# Altium PCB Enchante.PcbDoc
Units mm, origin at the board's own origin, x right, y up, seen from the top; angles counter-clockwise.
Board outline 76.36 x 55 mm, 2 copper layers (Top Layer, Bottom Layer); 104 components, 41 nets, 328 pads, 35 vias.
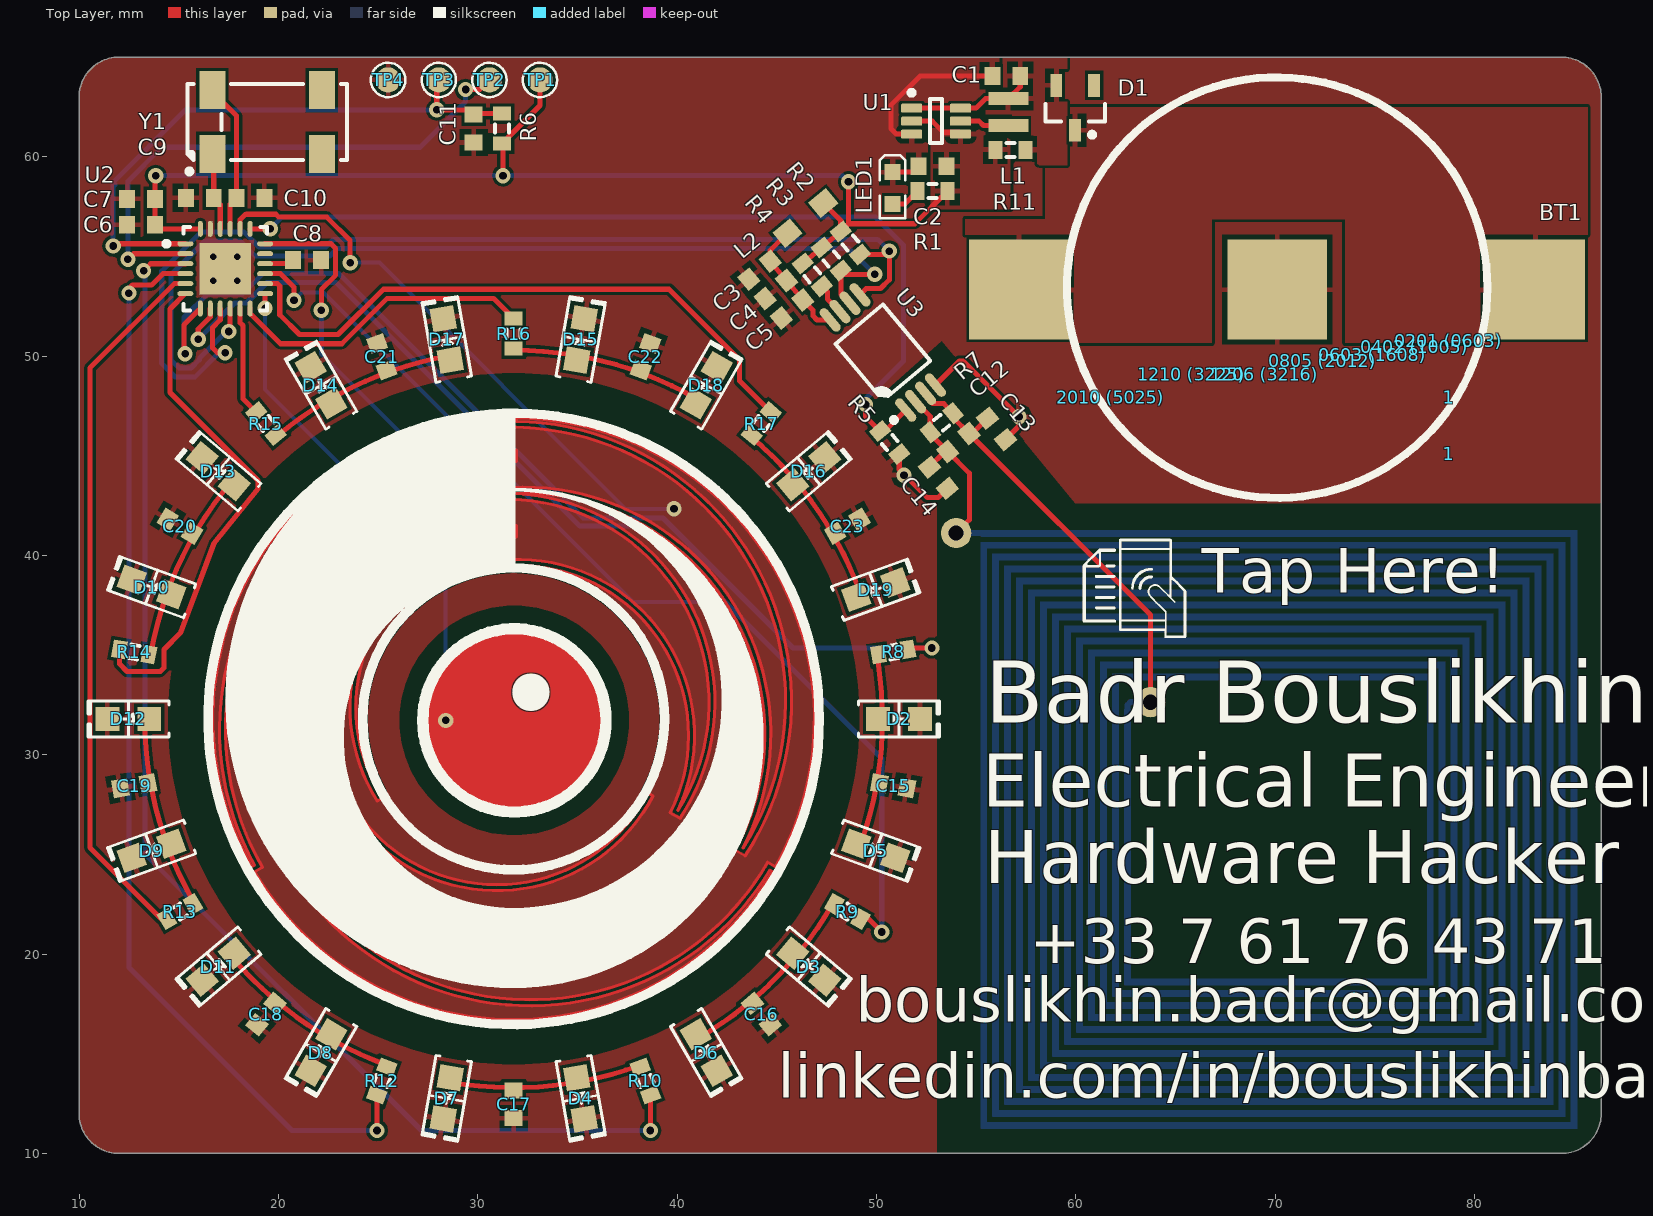
[diagram p0: Top Layer view]
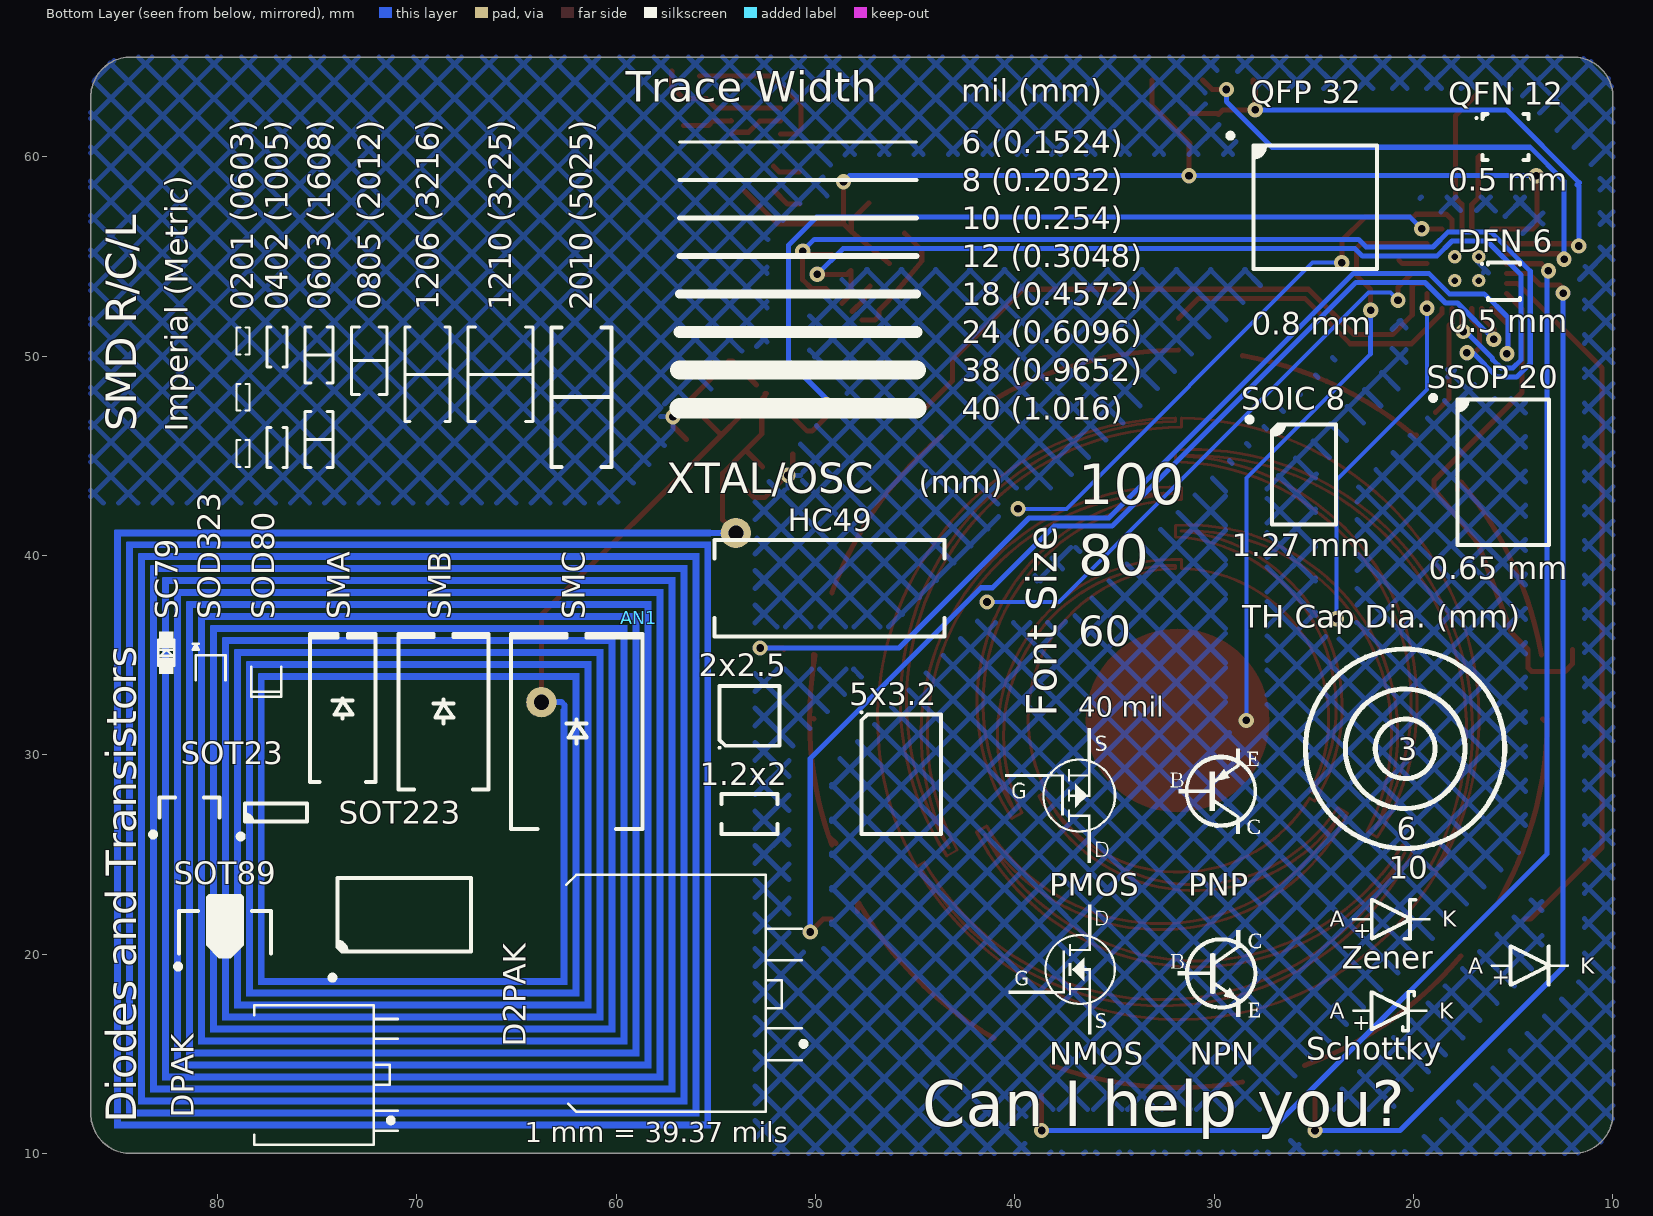
[diagram p1: Bottom Layer view, seen from below]

## Layer stack, top to bottom
Top Solder: solder mask 0.0102, Solder Resist, Dk 3.5
Top Layer: signal copper 0.0356
Dielectric 1: dielectric 0.32, FR-4, Dk 4.8
Bottom Layer: signal copper 0.0356
Bottom Solder: solder mask 0.0102, Solder Resist, Dk 3.5

## Board outline
10.382,10.824 10.311,10.928 10.247,11.036 10.19,11.148 10.14,11.264 10.098,11.382 10.063,11.503 10.035,11.625 10.016,11.749 10.004,11.874 10,12 10,63 10.004,63.126 10.016,63.251 10.035,63.375 10.063,63.497 10.098,63.618 10.14,63.736 10.19,63.852 10.247,63.963 10.311,64.072 10.382,64.176 10.459,64.275 10.542,64.369 10.631,64.458 10.725,64.541 10.824,64.618 10.928,64.689 11.036,64.753 11.148,64.81 11.264,64.86 11.382,64.902 11.503,64.937 11.625,64.965 11.749,64.984 11.874,64.996 12,65 84.36,65 84.486,64.996 84.611,64.984 84.735,64.965 84.857,64.937 84.978,64.902 85.096,64.86 85.212,64.81 85.323,64.753 85.432,64.689 85.536,64.618 85.635,64.541 85.729,64.458 85.818,64.369 85.901,64.275 85.978,64.176 86.049,64.072 86.113,63.963 86.17,63.852 86.22,63.736 86.262,63.618 86.297,63.497 86.325,63.375 86.344,63.251 86.356,63.126 86.36,63 86.36,12 86.356,11.874 86.344,11.749 86.325,11.625 86.297,11.503 86.262,11.382 86.22,11.264 86.17,11.148 86.113,11.036 86.049,10.928 85.978,10.824 85.901,10.725 85.818,10.631 85.729,10.542 85.635,10.459 85.536,10.382 85.432,10.311 85.323,10.247 85.212,10.19 85.096,10.14 84.978,10.098 84.857,10.063 84.735,10.035 84.611,10.016 84.486,10.004 84.36,10 12,10 11.874,10.004 11.749,10.016 11.625,10.035 11.503,10.063 11.382,10.098 11.264,10.14 11.148,10.19 11.036,10.247 10.928,10.311 10.824,10.382 10.725,10.459 10.631,10.542 10.542,10.631 10.459,10.725

## Design rules (kind name [scope] priority, off if disabled: settings)
Clearance PolyBottom_Track [OnBottom And InPolygon vs IsTrack] p1: gap=0.813
Clearance [All] p2: gap=0.152
HoleSize [All] p1: absolutevalues=TRUE maxlimit=6.3 minlimit=0.3 maxpercent=80.000 minpercent=20.000
MinimumSolderMaskSliver [All] p1: minsoldermaskwidth=0.2
PolygonConnect TouchWheel [IsVia and (InNet('CAP0.3') or InNet('CAP1.3') or InNet('CAP2.0') or InNet('CAP2.1') or InNet('CAP3.1'))] p1: connectstyle=Direct reliefconductorwidth=0.254 reliefentries=4 polygonreliefangle="90 Angle" airgapwidth=0.254
PolygonConnect ThermalVias [InComponent('U2')] p2: connectstyle=Direct reliefconductorwidth=0.254 reliefentries=4 polygonreliefangle="90 Angle" airgapwidth=0.254
PolygonConnect [All] p3: connectstyle=Relief reliefconductorwidth=0.254 reliefentries=4 polygonreliefangle="90 Angle" airgapwidth=0.254
RoomDefinition NFC [InComponentClass('Room Definition 2')] p1: confinementstyle=ConfineIn formatcopy=TRUE lockcomponents=FALSE outline 39.884,54.569 43.414,57.531 45.539,54.999 48.378,57.381 50.311,55.077 50.02,54.832 57.644,45.745 53.417,42.198 51.54,44.436 50.975,43.962 45.235,50.804 45.165,50.745 42.712,53.668 41.496,52.648
RoomDefinition Boost [InComponentClass('Room Definition 1')] p2: confinementstyle=ConfineIn formatcopy=TRUE lockcomponents=FALSE outline 49.852,56.593 49.852,60.403 50.461,60.403 50.461,63.717 52.045,63.717 52.045,64.877 55.053,64.877 55.053,63.895 57.841,63.895 57.841,61.451 59.21,61.451 59.21,56.943 51.76,56.943 51.76,56.593
RoutingVias [All] p1: holewidth=0.711 width=1.27 viastyle="Through Hole" minholewidth=0.3 minwidth=0.452 maxholewidth=0.711 maxwidth=1.27
SilkToSolderMaskClearance [IsPad] p1: minsilkscreentomaskgap=0.1 clearancetoexposedcopper=TRUE
SolderMaskExpansion [All] p1: expansion=0.154
Width [All] p1: maxlimit=0.254 minlimit=0.152 preferedwidth=0.254
27 further rules are at their usual default settings.

## Classes and differential pairs
component class "Room Definition 3": C11 GND R6 SBWTCK SBWTDIO VCC
component class "Room Definition 2": C3 C4 C5 C12 C13 C14 L2 R2 R3 R4 R5 R7 U3
component class "Room Definition 1": C1 C2 D1 L1 LED1 R1 R11 U1
component class Main: AN1 BT1 C1 C2 C3 C4 C5 C6 C7 C8 C9 C10 C11 C12 C13 C14 C15 C16 C17 C18 C19 C20 C21 C22 C23 D1 D2 D3 D4 D5 D6 D7 D8 D9 D10 D11 D12 D13 D14 D15 D16 D17 D18 D19 GND L1 L2 LED1 R1 R2 R3 R4 R5 R6 R7 R8 R9 R10 R11 R12 R13 R14 R15 R16 R17 SBWTCK SBWTDIO TP1 TP2 TP3 TP4 U1 U2 U3 VCC Y1
polygon class TouchWheel: Top

## Components (designator, comment, footprint, x,y, rotation, side; value= is the part's Value field where it differs from the comment)
1 "" "CAP 0201/0603" 78.715,47.939 r270 top
1 "" "CAP 0201/0603" 78.715,45.114 r270 top
"0201 (0603)" "" "CAP 0201/0603" 78.715,50.764 r270 top
"0402 (1005)" "" "CAP 0402/1005" 77.013,50.464 r270 top
"0603 (1608)" "" "CAP 0603/1608" 74.901,50.064 r270 top
"0805 (2012)" "" "CAP 0805/2012" 72.39,49.771 r270 top
"1206 (3216)" "" "CAP 1206/3216" 69.469,49.086 r270 top
"1210 (3225)" "" "CAP 1210/3225 - 1MM" 65.811,49.086 r270 top
"2010 (5025)" "" "STACKPOLE CSR2010" 61.747,47.943 r270 top
AN1 "NFC Antenna" NFC_Antenna 55.245,41.275 r0 bottom
BT1 "Battery" BC-2001 83.054,53.34 r180 top
C1 "Cap" 1608[0603] 56.515,64.059 r0 top
C2 "Cap" 1608[0603] 52.812,59.527 r0 top
C3 "Cap" 1608[0603] 44.136,54.312 r40 top
C4 "Cap" 1608[0603] 44.952,53.339 r40 top
C5 "Cap" 1608[0603] 45.768,52.366 r40 top
C6 "Cap" 1608[0603] 13.106,56.591 r0 top
C7 "Cap" 1608[0603] 13.106,57.887 r0 top
C8 "Cap" 1608[0603] 21.438,54.813 r180 top
C9 "Cap" 1608[0603] 16.053,57.937 r0 top
C10 "Cap" 1608[0603] 18.593,57.937 r180 top
C11 "Cap" 1608[0603] 29.794,61.417 r90 top
C12 "Cap" 1608[0603] 54.107,45.669 r40 top
C13 "Cap" 1608[0603] 56.023,46.348 r130 top
C14 "Cap" 1608[0603] 53.105,43.899 r130 top
C15 "Cap" 1608[0603] 50.837,28.444 r170 top
C16 "Cap" 1608[0603] 44.225,16.992 r130 top
C17 "Cap" 1608[0603] 31.799,12.469 r90 top
C18 "Cap" 1608[0603] 19.373,16.992 r50 top
C19 "Cap" 1608[0603] 12.761,28.444 r10 top
C20 "Cap" 1608[0603] 15.057,41.467 r330 top
C21 "Cap" 1608[0603] 25.187,49.967 r290 top
C22 "Cap" 1608[0603] 38.411,49.967 r250 top
C23 "Cap" 1608[0603] 48.541,41.467 r210 top
D1 "Schottky" SOT23_N 59.969,62.459 r270 top
D2 "1318243" "LED 0805/2012 GREEN" 51.131,31.801 r0 top
D3 "1318243" "LED 0805/2012 GREEN" 46.608,19.375 r320 top
D4 "1318243" "LED 0805/2012 GREEN" 35.156,12.763 r280 top
D5 "1318243" "LED 0805/2012 GREEN" 49.965,25.189 r340 top
D6 "1318243" "LED 0805/2012 GREEN" 41.465,15.059 r300 top
D7 "1318243" "LED 0805/2012 GREEN" 28.442,12.763 r260 top
D8 "1318243" "LED 0805/2012 GREEN" 22.133,15.059 r240 top
D9 "1318243" "LED 0805/2012 GREEN" 13.633,25.189 r200 top
D10 "1318243" "LED 0805/2012 GREEN" 13.633,38.413 r160 top
D11 "1318243" "LED 0805/2012 GREEN" 16.99,19.375 r220 top
D12 "1318243" "LED 0805/2012 GREEN" 12.467,31.801 r180 top
D13 "1318243" "LED 0805/2012 GREEN" 16.99,44.227 r140 top
D14 "1318243" "LED 0805/2012 GREEN" 22.133,48.543 r120 top
D15 "1318243" "LED 0805/2012 GREEN" 35.156,50.839 r80 top
D16 "1318243" "LED 0805/2012 GREEN" 46.608,44.227 r40 top
D17 "1318243" "LED 0805/2012 GREEN" 28.442,50.839 r100 top
D18 "1318243" "LED 0805/2012 GREEN" 41.465,48.543 r60 top
D19 "1318243" "LED 0805/2012 GREEN" 49.965,38.284 r20 top
L1 "Inductor" VLS2010E 56.622,62.245 r270 top
L2 "600 Ohm" "SMD 0805" 46.431,56.921 r220 top
LED1 "150060RS75000" LED_0603_Red 50.806,58.435 r90 top
R1 "Res1" J1-0603 52.812,58.283 r0 top
R2 "Res1" J1-0603 48.69,55.68 r130 top
R3 "Res1" J1-0603 47.737,54.88 r130 top
R4 "Res1" J1-0603 46.784,54.08 r130 top
R5 "Res1" J1-0603 50.663,45.664 r130 top
R6 "Res1" J1-0603 31.217,61.417 r270 top
R7 "Res1" J1-0603 53.274,46.661 r40 top
R8 "Res1" J1-0603 50.837,35.158 r10 top
R9 "Res1" J1-0603 48.541,22.135 r330 top
R10 "Res1" J1-0603 38.411,13.635 r290 top
R11 "Res1" J1-0603 56.718,60.35 r0 top
R12 "Res1" J1-0603 25.187,13.635 r250 top
R13 "Res1" J1-0603 15.057,22.135 r210 top
R14 "Res1" J1-0603 12.761,35.158 r170 top
R15 "Res1" J1-0603 19.373,46.61 r130 top
R16 "Res1" J1-0603 31.799,51.133 r90 top
R17 "Res1" J1-0603 44.225,46.61 r50 top
TP1 "TESTPOINT" TP-R60 33.122,63.856 r270 top
TP2 "TESTPOINT" TP-R60 30.582,63.856 r270 top
TP3 "TESTPOINT" TP-R60 28.042,63.856 r270 top
TP4 "TESTPOINT" TP-R60 25.502,63.856 r270 top
U1 "TLV61225DCKT" DCK0006A_M 52.99,61.788 r0 top
U2 "MSP430FR2532IRGET" RGE24_N 17.329,54.387 r0 top
U3 "M24SR04-Y" "ST TSSOP-8" 50.319,50.183 r130 top
Y1 "32.768kHz" "ABRACON ABS25" 19.431,61.747 r0 top
? "" SC-79 82.575,35.112 r90 top
? "" TO-252 73.66,13.945 r90 top
? "" D2PAK-3 54,17.983 r180 top
? "" "ON SEMI SOT-89 H" 79.629,20.904 r90 top
? "" "DIODES SOT-223" 70.637,21.971 r90 top
? "" "DIODES SOT-23-5 W5" 77.064,27.102 r90 top
? "" "DIODES SOT-23-3" 81.407,27.153 r90 top
? "" "DO214AB SMC" 61.984,31.172 r90 top
? "" "DO214AA SMB" 68.667,32.164 r90 top
? "" "DO214AC SMA" 73.721,32.316 r90 top
? "" "SOD80, LL-34" 77.557,33.663 r90 top
? "" SOD323 80.351,34.374 r270 top
? "" "CAP 0402/1005" 77.013,45.414 r270 top
? "" "CAP 0603/1608" 74.901,45.814 r270 top
? "" "ABRACON ABLS" 49.301,38.354 r180 top
? "" "Abracon ASVTX-09" 45.695,29.032 r180 top
? "" "ABRACON ABS06" 53.315,27.032 r180 top
? "" "Abracon ASDM" 53.315,31.953 r180 top
? "" "ATMEL SO-8 S8S1" 25.502,44.063 r180 top
? "" "INTERSIL SSOP-20" 15.493,44.178 r180 top
? "" "ST LQFP-32 7X7MM" 24.938,57.459 r180 top
? "" "Skyworks QFN-12 2x2mm" 15.393,60.993 r180 top
? "" "SKYWORKS DFN-6 1.5x1.5mm" 15.46,53.756 r180 top

## Footprints (in the part's own frame and the unit in brackets; to place one, negate y for a bottom-side part, rotate by r counter-clockwise, add the part's x,y. Pads: shape width x height; smd on the part's side, far side on the other; paste and mask are expansions set on the pad)
1608[0603] [mm] "Chip Capacitor, Body 1.6x0.8mm, IPC High Density"
  rect 0.8x0.9 smd: 1(-0.7,0) 2(0.7,0)
  body extent -0.87,-0.48 0.87,0.48, height 1.3
"ABRACON ABLS" [mm] "Crystal, 2-Leads, Body 4.70x11.40mm, Pitch 8.80mm, IPC Medium Density"
  rect 5.6x2.1 on Bottom Overlay: 1(-4.75,0) 2(4.75,0)
  body extent -6.35,-2.35 6.35,2.35, height 4.2
"ABRACON ABS06" [mm] "Crystal, 2-Leads, Body 1.20x2.00mm, Pitch 1.50mm, IPC Medium Density"
  rect 0.75x1.4 on Bottom Overlay: 1(-0.725,0) 2(0.725,0)
  body extent -1.02,-0.63 1.03,0.62, height 0.6
"ABRACON ABS25" [mm]
  rect 1.3x1.9 smd: 1(-2.75,-1.6) 2(2.75,-1.6) 3(2.75,1.6) 4(-2.75,1.6)
  silkscreen extent -4.02,-2.6 4,1.9, body extent -4,-1.9 4,1.9, height 2.5
"Abracon ASDM" [mm] "MEMS Clock, 4-Leads, Body 2.00x2.50mm, Pitch 1.65mm, IPC Medium Density"
  rect 0.65x0.85 on Bottom Overlay: 1(-0.825,0.775) 2(0.825,0.775) 3(0.825,-0.775) 4(-0.825,-0.775)
  body extent -1.28,-1.03 1.27,1.02, height 0.85
"Abracon ASVTX-09" [mm] "XO, 4-Leads, Body 5.00x3.20mm, Pitch 3.70mm, IPC Medium Density"
  rect 1x1.5 on Bottom Overlay: 1(-1.2,-1.9) 2(-1.2,1.9) 3(1.2,1.9) 4(1.2,-1.9)
  body extent -1.63,-2.53 1.62,2.52, height 1.5
"ATMEL SO-8 S8S1" [mm] "SOIC, 8-Leads, Body 4.89x3.90mm, Pitch 1.27mm, IPC Medium Density"
  oval 1.45x0.6 on Bottom Overlay: 1(-2.725,-1.905) 2(-2.725,-0.635) 3(-2.725,0.635) 4(-2.725,1.905) 5(2.725,1.905) 6(2.725,0.635) 7(2.725,-0.635) 8(2.725,-1.905)
  body extent -3.01,-2.45 3.01,2.45, height 1.5
BC-2001 [mm]
  rect 5x5 smd paste-25.4 mask-25.4: +(0,0) -(12.95,0)
  rect 5x5 smd mask-25.4: +(25.9,0)
  silkscreen extent 2.4,-10.65 23.5,10.45, body extent 2.94,-10.01 22.96,10.01, height 3.17
"CAP 0201/0603" [mm] "Chip Capacitor, 2-Leads, Body 0.60x0.30mm, IPC Medium Density"
  rect 0.4x0.35 on Bottom Overlay: 1(-0.31,0) 2(0.31,0)
  body extent -0.3,-0.15 0.3,0.15, height 0.3
"CAP 0402/1005" [mm] "Chip Capacitor, 2-Leads, Body 1.02x0.51mm, IPC Medium Density"
  rect 0.6x0.64 on Bottom Overlay: 1(-0.44,0) 2(0.44,0)
  body extent -0.5,-0.26 0.5,0.26, height 0.52
"CAP 0603/1608" [mm] "Chip Capacitor, 2-Leads, Body 1.60x0.80mm, IPC Medium Density"
  rect 0.9x1 on Bottom Overlay: 1(-0.675,0) 2(0.675,0)
  body extent -0.8,-0.41 0.8,0.41, height 0.82
"CAP 0805/2012" [mm] "Chip Capacitor, 2-Leads, Body 2.00x1.20mm, IPC Medium Density"
  rect 1.3x1.4 on Bottom Overlay: 1(-0.8,0) 2(0.8,0)
  body extent -1,-0.64 1,0.64, height 1.26
"CAP 1206/3216" [mm] "Chip Capacitor, 2-Leads, Body 3.25x1.60mm, IPC Medium Density"
  rect 1.3x1.8 on Bottom Overlay: 1(-1.45,0) 2(1.45,0)
  body extent -1.6,-0.81 1.6,0.81, height 1.62
"CAP 1210/3225 - 1MM" [mm] "Chip Capacitor, 2-Leads, Body 3.20x2.50mm, IPC Medium Density"
  rect 1.3x2.7 on Bottom Overlay: 1(-1.4,0) 2(1.4,0)
  body extent -1.6,-1.25 1.6,1.25, height 1
D2PAK-3 [mil] "D-PAK/TO-263-3; 3 Leads (1 Cropped); Body 14.7 (inc. leads) x 10.2 mm (LxW max)"
  round 20 on Mech15: 0(0,0)
  rrect25% 120x40 on Bottom Overlay: 1(222.5,100) 3(222.5,-100)
  rrect25% 330x420 on Bottom Overlay: 4(-222.5,0)
  body extent -361,-197 256,197, height 189
DCK0006A_M [mm] "SOT23, 6-Leads, Body 2.15x1.4mm, Pitch 0.65mm, IPC Low Density"
  rrect22% 1.05x0.45 smd: 1(-1.225,0.65) 2(-1.225,0) 3(-1.225,-0.65) 4(1.225,-0.65) 5(1.225,0) 6(1.225,0.65)
  silkscreen extent -1.35,-1.1 0.3,1.55, body extent -1.14,-1 1.14,1, height 0.94
"DIODES SOT-23-3" [mm] "SOT23, 3-Leads, Body 2.90x2.40mm, Pitch 0.95mm, IPC Medium Density"
  rect 0.95x0.65 on Bottom Overlay: 1(-1.15,-0.95) 2(1.15,0) 3(-1.15,0.95)
  body extent -1.41,-1.45 1.41,1.45, height 1.5
"DIODES SOT-23-5 W5" [mm] "SOT23, 5-Leads, Body 3.00x2.85mm, Pitch 0.95mm, IPC Medium Density"
  rect 0.8x0.55 on Bottom Overlay: 1(-1.2,-0.95) 2(-1.2,0) 3(-1.2,0.95) 4(1.2,0.95) 5(1.2,-0.95)
  body extent -1.41,-1.45 1.41,1.45, height 1.5
"DIODES SOT-223" [mm] "SOT223, 4-Leads, Body 6.50x7.00mm (avg), Pitch 2.30mm, IPC Medium Density"
  rect 1.6x1.2 on Bottom Overlay: 1(-3.2,-2.3) 2(-3.2,0) 3(-3.2,2.3)
  rect 1.6x3.3 on Bottom Overlay: 4(3.2,0)
  body extent -3.52,-3.25 3.5,3.25, height 1.8
"DO214AA SMB" [mm] "Molded Diode, 2-Leads, Body 4.31x3.62mm, IPC Medium Density"
  rect 2.45x2.15 on Bottom Overlay: 1(-2.15,0) 2(2.15,0)
  body extent -2.6,-1.8 2.6,1.8, height 2.4
"DO214AB SMC" [mm] "Molded Diode, 2-Leads, Body 6.85x5.90mm, IPC Medium Density"
  rect 2.45x3.15 on Bottom Overlay: 1(-3.1,0) 2(3.1,0)
  body extent -3.97,-2.95 3.97,2.95, height 2.6
"DO214AC SMA" [mm] "Molded Diode, 2-Leads, Body 4.30x2.60mm, IPC Medium Density"
  rect 2.5x1.7 on Bottom Overlay: 1(-2,0) 2(2,0)
  body extent -2.6,-1.37 2.6,1.37, height 2.4
"INTERSIL SSOP-20" [mm] "SSOP, 20-Leads, Body 7.20x5.29mm, Pitch 0.65mm, IPC Medium Density"
  oval 1.65x0.5 on Bottom Overlay: 1(-3.525,-2.925) 2(-3.525,-2.275) 3(-3.525,-1.625) 4(-3.525,-0.975) 5(-3.525,-0.325) 6(-3.525,0.325) 7(-3.525,0.975) 8(-3.525,1.625) 9(-3.525,2.275) 10(-3.525,2.925) 11(3.525,2.925) 12(3.525,2.275) 13(3.525,1.625) 14(3.525,0.975) 15(3.525,0.325) 16(3.525,-0.325) 17(3.525,-0.975) 18(3.525,-1.625) 19(3.525,-2.275) 20(3.525,-2.925)
  body extent -3.91,-3.6 3.91,3.6, height 1.97
J1-0603 [mm] "Chip Resistor, Body 1.6x0.8mm, IPC High Density"
  rect 0.7x0.9 smd: 1(-0.75,0) 2(0.75,0)
  silkscreen extent -0.2,-0.35 0.2,0.35, body extent -0.85,-0.48 0.85,0.48, height 0.9
"LED 0805/2012 GREEN" [mm] "Chip Diode, 2-Leads, Body 2.00x1.25mm, IPC Medium Density"
  rect 1.2x1.2 smd: 1(-1.05,0) 2(1.05,0)
  silkscreen extent -2.03,-0.9 2.03,0.9, body extent -1,-0.62 1,0.63, height 0.9
LED_0603_Red [mm] "Chip LED, 2-Leads, Body 1.6x0.8mm, IPC Medium Density"
  rect 0.8x0.8 smd: 1(-0.8,0) 2(0.8,0)
  silkscreen extent -1.52,-0.64 1.65,0.64, body extent -0.8,-0.4 0.8,0.4, height 0.7
NFC_Antenna [mil] "L=5.51 uH, tuned for 13.56 MHz"
  round 60 hole 30: AC0(335,340) AC1(-49.09,5.91)
  Top Layer region: 0,0 0,11.81 1165.35,11.81 1165.35,1169.29 11.81,1169.29 11.81,35.43 1141.73,35.43 1141.73,1145.67 35.43,1145.67 35.43,59.06 1118.11,59.06 1118.11,1122.05 59.06,1122.05 59.06,82.68 1094.49,82.68 1094.49,1098.43 82.68,1098.43 82.68,106.3 1070.87,106.3 1070.87,1074.8 106.3,1074.8 106.3,129.92 1047.24,129.92 1047.24,1051.18 129.92,1051.18 129.92,153.54 1023.62,153.54 1023.62,1027.56 153.54,1027.56 153.54,177.17 1000,177.17 1000,1003.94 177.17,1003.94 177.17,200.79 976.38,200.79 976.38,980.32 200.79,980.32 200.79,224.41 952.76,224.41 952.76,956.69 224.41,956.69 224.41,248.03 929.13,248.03 929.13,933.07 248.03,933.07 248.03,271.65 905.51,271.65 905.51,909.45 271.65,909.45 271.65,295.28 881.89,295.28 881.89,885.83 295.28,885.83 295.28,354.33 283.46,354.33 283.46,897.64 893.7,897.64 893.7,283.46 259.84,283.46 259.84,921.26 917.32,921.26 917.32,259.84 236.22,259.84 236.22,944.88 940.94,944.88 940.94,236.22 212.6,236.22 212.6,968.5 964.57,968.5 964.57,212.6 188.98,212.6 188.98,992.13 988.19,992.13 988.19,188.98 165.35,188.98 165.35,1015.75 1011.81,1015.75 1011.81,165.35 141.73,165.35 141.73,1039.37 1035.43,1039.37 1035.43,141.73 118.11,141.73 118.11,1062.99 1059.06,1062.99 1059.06,118.11 94.49,118.11 94.49,1086.61 1082.68,1086.61 1082.68,94.49 70.87,94.49 70.87,1110.24 1106.3,1110.24 1106.3,70.87 47.24,70.87 47.24,1133.86 1129.92,1133.86 1129.92,47.24 23.62,47.24 23.62,1157.48 1153.54,1157.48 1153.54,23.62 0,23.62 0,1181.1 1177.17,1181.1 1177.17,0
  Top Layer lines w0.5: 0,1181.1 0,23.62 1153.54,23.62 1153.54,1157.48 23.62,1157.48 23.62,47.24 1129.92,47.24 1129.92,1133.86 47.24,1133.86 47.24,70.87 1106.3,70.87 1106.3,1110.24 70.87,1110.24 70.87,94.49 1082.68,94.49 1082.68,1086.61 94.49,1086.61 94.49,118.11 1059.06,118.11 1059.06,1062.99 118.11,1062.99 118.11,141.73 1035.43,141.73 1035.43,1039.37 141.73,1039.37 141.73,165.35 1011.81,165.35 1011.81,1015.75 165.35,1015.75 165.35,188.98 988.19,188.98 988.19,992.13 188.98,992.13 188.98,212.6 964.57,212.6 964.57,968.5 212.6,968.5 212.6,236.22 940.94,236.22 940.94,944.88 236.22,944.88 236.22,259.84 917.32,259.84 917.32,921.26 259.84,921.26 259.84,283.46 893.7,283.46 893.7,897.64 283.46,897.64 283.46,354.33 289.37,354.33 295.28,354.33 295.28,885.83 881.89,885.83 881.89,295.28 271.65,295.28 271.65,909.45 905.51,909.45 905.51,271.65 248.03,271.65 248.03,933.07 929.13,933.07 929.13,248.03 224.41,248.03 224.41,956.69 952.76,956.69 952.76,224.41 200.79,224.41 200.79,980.32 976.38,980.32 976.38,200.79 177.17,200.79 177.17,1003.94 1000,1003.94 1000,177.17 153.54,177.17 153.54,1027.56 1023.62,1027.56 1023.62,153.54 129.92,153.54 129.92,1051.18 1047.24,1051.18 1047.24,129.92 106.3,129.92 106.3,1074.8 1070.87,1074.8 1070.87,106.3 82.68,106.3 82.68,1098.43 1094.49,1098.43 1094.49,82.68 59.06,82.68 59.06,1122.05 1118.11,1122.05 1118.11,59.06 35.43,59.06 35.43,1145.67 1141.73,1145.67 1141.73,35.43 11.81,35.43 11.81,1169.29 1165.35,1169.29 1165.35,11.81 0,11.81 0,5.91 0,0 1177.17,0 1177.17,1181.1 0,1181.1
  Top Layer lines w11.81: -49.09,5.91 0,5.91 ; 289.37,354.33 289.37,345.63 295,340 335,340
"ON SEMI SOT-89 H" [mm] "SOT89, 3-Leads, Body 4.50x2.50mm, Pitch 1.50mm, Lead Span 3.3mm, IPC Medium Density"
  rect 1.4x0.6 on Bottom Overlay: 1(-1.4,-1.5) 3(-1.4,1.5)
  rect 1x0.6 on Bottom Overlay: 2(-1.6,0)
  body extent -2.05,-2.25 2.1,2.25, height 1.5
RGE24_N [mm] "24-Pin Plastic Quad Flat No-Lead 0.5 mm Pitch, IPC Medium Density"
  oval 0.8x0.25 smd: 1(-2,1.25) 2(-2,0.75) 3(-2,0.25) 4(-2,-0.25) 5(-2,-0.75) 6(-2,-1.25) 13(2,-1.25) 14(2,-0.75) 15(2,-0.25) 16(2,0.25) 17(2,0.75) 18(2,1.25)
  oval 0.25x0.8 smd: 7(-1.25,-2) 8(-0.75,-2) 9(-0.25,-2) 10(0.25,-2) 11(0.75,-2) 12(1.25,-2) 19(1.25,2) 20(0.75,2) 21(0.25,2) 22(-0.25,2) 23(-0.75,2) 24(-1.25,2)
  rect 2.6x2.6 smd: 25(0,0)
  silkscreen extent -3.07,-2.1 2.1,2.1, body extent -2.07,-2.07 2.07,2.07, height 1
SC-79 [mm]
  rect 0.6x0.5 on Bottom Overlay paste-25.4 mask-25.4: A(-0.65,0) C(0.65,0)
"SKYWORKS DFN-6 1.5x1.5mm" [mm] "DFN, 6-Leads, Body 1.50x1.50mm, Pitch 0.50mm, Thermal Pad 0.70x1.20mm, IPC High Density"
  oval 0.35x0.25 on Bottom Overlay: 1(-0.725,-0.5) 2(-0.725,0) 3(-0.725,0.5) 4(0.725,0.5) 5(0.725,0) 6(0.725,-0.5)
  rect 0.7x1.2 on Bottom Overlay: 7(0,0)
  body extent -0.75,-0.75 0.75,0.75, height 0.5
"Skyworks QFN-12 2x2mm" [mm] "QFN, 12-Leads, Body 2.00x2.00mm, Pitch 0.50mm, Thermal Pad 0.76x0.76mm, IPC High Density"
  oval 0.44x0.2 on Bottom Overlay: 1(-0.93,-0.5) 2(-0.93,0) 3(-0.93,0.5) 7(0.93,0.5) 8(0.93,0) 9(0.93,-0.5)
  oval 0.2x0.44 on Bottom Overlay: 4(-0.5,0.93) 5(0,0.93) 6(0.5,0.93) 10(0.5,-0.93) 11(0,-0.93) 12(-0.5,-0.93)
  rect 0.76x0.76 on Bottom Overlay: 13(0,0)
  body extent -1,-1 1,1, height 0.55
"SMD 0805" [mm] "Chip Inductor, 2-Leads, Body 2,0x1,2mm"
  rect 1.15x1 smd: 1(-1.175,0) 2(1.175,0)
  body extent -1,-0.6 1,0.6, height 0.89
"SOD80, LL-34" [mm] "Diode, MiniMELF"
  round 0.5 on Mech15: 0(0,0)
  rrect25% 1.1x1.65 on Bottom Overlay: A(1.65,0) K(-1.65,0)
  body extent -1.8,-0.75 1.8,0.75, height 1.47
SOD323 [mm] "SOD-323; 2 Leads; Body 1.8 x 1.35 mm, (LxW)"
  round 0.508 on Mech15: 0(0,0)
  rrect25% 0.6x0.7 on Bottom Overlay: A(1.25,0) K(-1.25,0)
  body extent -1.3,-0.67 1.3,0.68, height 1.1
SOT23_N [mm] "SOT23, 3-Leads, Body 2.9x1.3mm, Pitch 0.95mm, Lead Span 2.3mm - Reverse Pinning, IPC Medium Density"
  rect 1.15x0.6 smd: 1(1.125,0) 2(-1.125,-0.95) 3(-1.125,0.95)
  silkscreen extent -0.2,-1.5 1.47,1.5, body extent -0.7,-1.5 0.7,1.5, height 1.1
"ST LQFP-32 7X7MM" [mm] "LQFP, 32-Leads, Body 7.00x7.00mm, Pitch 0.80mm, IPC Medium Density"
  oval 1.2x0.5 on Bottom Overlay: 1(-4.25,-2.8) 2(-4.25,-2) 3(-4.25,-1.2) 4(-4.25,-0.4) 5(-4.25,0.4) 6(-4.25,1.2) 7(-4.25,2) 8(-4.25,2.8) 17(4.25,2.8) 18(4.25,2) 19(4.25,1.2) 20(4.25,0.4) 21(4.25,-0.4) 22(4.25,-1.2) 23(4.25,-2) 24(4.25,-2.8)
  oval 0.5x1.2 on Bottom Overlay: 9(-2.8,4.25) 10(-2,4.25) 11(-1.2,4.25) 12(-0.4,4.25) 13(0.4,4.25) 14(1.2,4.25) 15(2,4.25) 16(2.8,4.25) 25(2.8,-4.25) 26(2,-4.25) 27(1.2,-4.25) 28(0.4,-4.25) 29(-0.4,-4.25) 30(-1.2,-4.25) 31(-2,-4.25) 32(-2.8,-4.25)
  body extent -4.51,-4.51 4.51,4.51, height 1.55
"ST TSSOP-8" [mm] "TSSOP, 8-Leads, Body 3.00x4.40mm, Pitch 0.65mm, IPC Medium Density"
  oval 1.4x0.45 smd: 1(-2.95,0.975) 2(-2.95,0.325) 3(-2.95,-0.325) 4(-2.95,-0.975) 5(2.95,-0.975) 6(2.95,-0.325) 7(2.95,0.325) 8(2.95,0.975)
  silkscreen extent -3.07,-1.55 1.85,1.87, body extent -3.21,-1.5 3.21,1.5, height 1.2
"STACKPOLE CSR2010" [mm] "Chip Resistor, 2-Leads, Body 5.00x2.54mm, IPC Medium Density"
  rect 1.4x2.5 on Bottom Overlay: 1(-2.5,0) 2(2.5,0)
  body extent -2.57,-1.27 2.58,1.27, height 0.5
TO-252 [mm] "D-PAK/TO-252-AA; 3 Leads (1 Cropped); Body 10.3 (inc. leads) x 6.7 mm (LxW max)"
  round 0.5 on Mech15: 0(0,0)
  rrect25% 1x1.6 on Bottom Overlay: 1(-2.285,3.7) 3(2.285,3.7)
  rrect25% 5.5x5.7 on Bottom Overlay: 4(0,-3.7)
  body extent -3.3,-5.76 3.3,3.95, height 2.31
TP-R60 [mm]
  round 1.27 smd paste-1.27: 1(0,0)
  silkscreen extent -0.86,-0.86 0.86,0.86, body extent -0.76,-0.76 0.76,0.76, height 0.25
VLS2010E [mm] "Inductor"
  rect 0.65x2 smd: 1(-0.675,0) 2(0.675,0)
  body extent -0.99,-0.99 0.99,0.99, height 1

## Part data
AN1: library part NFC_Antenna, "L=5.51 uH, tuned for 13.56 MHz"
BT1: "Multicell Battery"
C1 C2 C3 C4 C5 C6 C7 C8 C9 C10 C11 C12 C13 C14 C15 C16 C17 C18 C19 C20 C21 C22 C23: "Capacitor"
D1: library part "D Schottky", "Schottky Diode"
D2 D3 D4 D5 D6 D7 D8 D9 D10 D11 D12 D13 D14 D15 D16 D17 D18 D19: library part Diode, "Rectifier Diode"
L2: library part "WE-CBF 0805, 742792042", "SMD EMI Suppression Ferrite Beads WE-CBF, Z= 600 Ohm"
LED1: library part "WL-SMCW 0603  150060RS75000", "SMD mono-color Chip LED, WL-SMCW, Red"
R1 R2 R3 R4 R5 R6 R7 R8 R9 R10 R11 R12 R13 R14 R15 R16 R17: "Resistor"
TP1 TP2 TP3 TP4: "SMD test pin"
U1: library part CMP-0343-00078-2, "Voltage Converter with 0.7 to 3.3 V Input, -40 to 85 degC, 6-Pin SC70 (DCK), Green (RoHS & no Sb/Br)"
U2: "MSP430 Captivate Microcontroller"
U3: "Dynamic NFC/RFID tag IC with 4-Kbit EEPROM,   NFC Forum Type 4 Tag and I²C interface"
Y1: library part "Abracon Crystal ABS25", "SMT Crystal"

## Via types
v1: diameter 0.766, hole 0.383, Top Layer to Bottom Layer, tented both sides, 31 vias
v2: diameter 0.66, hole 0.33, Top Layer to Bottom Layer, tented both sides, 4 vias

## Nets (pads, with @x,y where several pads share a name; then routed paths per layer and width w, separated by ;. In a path a pad name is that pad's centre, name@x,y a point inside that pad or via, vN(x,y) a via of type N, cw(c..) or ccw(c..) an arc to the next point about the centre after c; other vN are vias at no path point)
CAP0.3: U2.13 | length 258
  Top Layer w0.151: 18.812,24.129 ccw(c31.799,31.801) 44.785,24.129 44.653,24.206 cw(c32.616,31.464) 20.04,25.186 20.551,25.482 ccw(c30.887,31.741) 41.525,26.013 cw(c32.716,31.722) 23.308,27.067 23.8,27.355 ccw(c30.951,32.023) 38.386,27.821 cw(c31.799,31.801) 25.209,27.826 24.955,27.676 cw(c32.424,32.409) 31.654,41.217 ccw(c31.294,31.028) 22.335,26.163 21.822,25.867 cw(c32.203,32.621) 31.648,44.993 31.648,45.006 ccw(c31.098,31.262) 19.203,24.355 18.812,24.129
  Top Layer w0.254: v1(19.329,52.4) U2.13
  Bottom Layer w0.203: v1(19.329,52.4) 19.329,48.336 23.876,43.79 v1(23.876,36.83)
CAP1.3: U2.15 | length 269.2
  Top Layer w0.113: 42.895,25.221 43.407,24.925
  Top Layer w0.151: 42.895,25.221 ccw(c32.307,31.041) 31.95,43.119 31.95,43.107 cw(c31.401,32.624) 40.141,26.811 39.649,27.098 ccw(c32.03,30.957) 31.95,39.496 31.95,39.341 cw(c31.799,31.801) 38.401,28.157 38.793,27.937 cw(c30.951,32.023) 23.7,26.963 ccw(c32.716,31.722) 41.424,26.419 41.926,26.128 cw(c30.887,31.741) 20.45,25.075 20.439,25.068 ccw(c32.616,31.464) 44.545,24.616 44.936,24.391 ccw(c31.799,31.801) 31.95,46.884 31.95,46.732 cw(c31.682,32.678) 43.407,24.925
  Top Layer w0.254: U2.15 20.097,54.137 20.777,53.457 v1@20.777,53.101
  Bottom Layer w0.203: v1(20.777,52.807) 21.158,53.188 22.269,53.188 37.788,37.668 v1(41.4,37.668)
CAP2.0: U2.17
CAP2.1: U2.18 | length 30.2
  Top Layer w0.254: U2.18 22.631,55.637 22.868,55.4 22.868,54.06 22.149,53.341 v1(22.149,52.299)
  Bottom Layer w0.203: 22.149,50.114 28.387,43.876 v1(28.387,31.724)
  Bottom Layer w0.254: 22.149,50.114 v1(22.149,52.299)
CAP3.1: U2.20 | length 268.9
  Top Layer w0.151: 18.662,24.391 cw(c31.799,31.801) 31.648,46.884 31.648,46.432 cw(c31.682,32.678) 43.308,25.328 ccw(c32.321,31.042) 31.648,43.408 31.648,42.817 cw(c31.401,32.624) 40.038,27.207 ccw(c32.03,30.957) 31.648,39.791 31.648,39.341 ccw(c31.799,31.801) 25.19,28.168 25.058,28.087 cw(c32.424,32.409) 31.95,40.936 31.95,41.505 ccw(c31.294,31.028) 21.932,26.279 21.923,26.272 cw(c32.203,32.621) 31.95,44.702 31.95,45.293 ccw(c31.098,31.262) 18.793,24.467 18.662,24.391
  Top Layer w0.254: U2.20 18.079,56.85 18.331,57.101 18.375,57.101 18.391,57.117 19.863,57.117 20.008,56.972 22.428,56.972 23.597,55.804 v1(23.597,54.686)
  Bottom Layer w0.203: v1(23.597,54.686) 25.07,54.686 37.419,42.337 v1(39.844,42.337)
GND: BT1.- C1.1 C2.1 C3.1 C4.1 C5.1 C6.1 C7.1 C8.1 C9.1 C10.1 C11.1 C13.1 C14.1 C15.1 C16.1 C17.1 C18.1 C19.1 C20.1 C21.1 C22.1 C23.1 D2.2 D3.2 D4.2 D5.2 D6.2 D7.2 D8.2 D9.2 D10.2 D11.2 D12.2 D13.2 D14.2 D15.2 D16.2 D17.2 D18.2 D19.2 LED1.2 R5.1 TP4.1 U1.3 U2.23 U2.25 U3.4 | length 20.9
  Top Layer w0.254: U2.25@16.579,55.137 v2(16.729,54.987) ; LED1.2 51.82,59.235 C2.1 ; R5.1 51.145,44.308 52.553,42.901 53.092,42.901 C14.1 ; U1.3 51.003,61.138 50.724,61.417 50.724,62.584 52.198,64.059 C1.1 ; U3.4 54.171,49.759 54.356,49.759 v1(57.15,46.965) 57.15,46.489 C13.1
  other v1: 51.384,44.018
  other v2: 16.729,53.787 17.929,53.787 17.929,54.987
I2C_SCL: R3.1 U2.10 U3.6 | length 50.2
  Top Layer w0.254: v1@17.302,51.359 17.403,51.257 v1@17.422,51.257 ; v1@17.42,51.255 v1@17.422,51.257 ; v1(17.503,51.236) 17.443,51.236 v1@17.422,51.257 ; U2.10 17.579,51.414 v1@17.422,51.257 ; U3.6 48.219,53.104 R3.1 48.423,54.102 v1(49.911,54.102)
  Bottom Layer w0.254: v1(17.503,51.236) 17.385,51.236 16.03,49.88 16.03,49.819 15.612,49.401 15.021,49.401 14.603,49.819 14.603,54.068 16.313,55.778 18.072,55.778 18.833,55.016 22.562,55.016 22.946,55.4 48.613,55.4 v1(49.911,54.102)
I2C_SDA: R2.1 U2.9 U3.5 | length 54.3
  Top Layer w0.254: U2.9 17.079,51.821 16.688,51.43 16.688,51.148 16.69,51.146 16.69,50.555 16.688,50.553 16.688,50.419 16.942,50.165 v1(17.323,50.165) ; U3.5 49.489,53.389 50.206,53.389 50.648,53.83 v1(50.648,55.27) 50.483,55.105 R2.1
  Bottom Layer w0.254: v1(17.323,50.165) 17.022,50.165 15.801,48.944 14.831,48.944 14.146,49.629 14.146,54.258 16.123,56.235 18.261,56.235 19.023,55.474 22.373,55.474 22.756,55.857 50.061,55.857 v1(50.648,55.27)
LED1: R8.2 U2.7 | length 51.9
  Top Layer w0.254: v1(15.316,50.114) 15.263,50.167 15.263,51.571 U2.7 ; R8.2 51.645,35.357 v1(52.781,35.357)
  Bottom Layer w0.254: v1(15.316,50.114) 15.263,50.167 15.263,51.934 16.456,53.127 18.203,53.127 19.231,54.155 23.01,54.155 35.285,41.88 39.293,41.88 45.816,35.357 v1(52.781,35.357)
LED2: R9.2 U2.8 | length 57.2
  Top Layer w0.254: v1(15.977,50.851) 15.977,51.365 16.579,51.968 U2.8 ; R9.2 49.614,21.76 v1(50.267,21.107)
  Bottom Layer w0.254: v1(15.977,50.851) 17.795,52.669 18.392,52.669 19.421,53.698 22.893,53.698 35.117,41.473 38.029,41.473 41.12,38.382 41.696,38.382 50.267,29.811 v1(50.267,21.107)
LED3: R10.2 U2.3 | length 64.9
  Top Layer w0.254: v1(13.233,54.28) 13.589,54.635 15.328,54.635 U2.3 ; v1(38.659,11.151) 38.659,12.921 R10.2
  Bottom Layer w0.254: v1(13.233,54.28) 13.233,54.53 13.312,54.451 13.312,25.017 27.178,11.151 v1(38.659,11.151)
LED4: R12.2 U2.4 | length 54.8
  Top Layer w0.254: v1(12.497,53.162) 12.497,53.391 12.672,53.566 13.638,53.566 14.208,54.137 U2.4 ; R12.2 24.943,12.918 v1(24.943,11.151)
  Bottom Layer w0.254: v1(12.497,53.162) 12.497,19.329 20.676,11.151 v1(24.943,11.151)
LED5: R13.2 U2.5 | length 36
  Top Layer w0.254: R13.2 14.122,21.76 10.538,25.344 10.538,49.4 14.775,53.637 U2.5
LED6: R14.2 U2.6 | length 25.5
  Top Layer w0.254: R14.2 12.022,34.562 12.402,34.182 14.072,34.182 14.252,34.363 14.252,35.284 15.088,36.119 16.764,40.615 18.97,43.342 18.97,43.763 14.554,48.179 14.554,52.362 U2.6
LED7: R15.2 U2.11 | length 5.5
  Top Layer w0.254: U2.11 18.079,51.668 18.216,51.531 18.216,47.859 R15.2
LED8: R16.2 U2.12 | length 15.5
  Top Layer w0.254: U2.12 18.579,52.141 20.099,50.622 23.177,50.622 25.454,52.899 30.783,52.899 R16.2
LED9: R17.2 U2.14 | length 31.4
  Top Layer w0.254: U2.14 19.95,53.637 20.064,53.523 20.064,52.072 21.057,51.079 22.988,51.079 25.264,53.356 39.593,53.356 43.14,49.809 43.14,48.752 R17.2
NetAN1_AC0: AN1.AC0 C12.2 C13.2 R7.2 U3.3 | length 21.8
  Top Layer w0.254: U3.3 52.532,48.132 52.532,47.997 52.803,47.726 52.803,47.613 53.379,47.613 R7.2 53.849,46.913 C12.2 ; C13.2 54.807,46.119 C12.2 ; AN1.AC0 63.754,37.008 C12.2
NetAN1_AC1: AN1.AC1 C12.1 C14.2 R7.1 U3.2 | length 9.2
  Top Layer w0.254: U3.2 52.7,46.981 R7.1 52.7,46.09 C12.1 ; C14.2 53.438,45.219 C12.1 ; AN1.AC1 54.661,41.788 54.661,44.129 C12.1
NetC15_2: C15.2 D2.1 D5.1 R8.1 | length 12.5
  Top Layer w0.254: D5.1 D5.1@49.334,25.904 ; C15.2@50.018,28.589 ccw(c31.799,31.801) C15.2@50.081,28.969 ; D2.1 D2.1@50.099,31.819 ; R8.1 50.099,34.516 ; C15.2 50.081,28.633 C15.2@50.081,28.969 ; D5.1@49.334,25.904 ccw(c31.799,31.801) C15.2@50.081,28.969 ; D5.1@49.334,25.904 cw(c31.799,31.801) 49.183,25.474 ccw(c31.799,31.801) D5.1@49.334,25.904 ; C15.2@50.081,28.969 ccw(c31.799,31.801) 50.099,34.516 ; 50.099,34.516 ccw(c31.799,31.801) 50.018,35.013 cw(c31.799,31.801) 50.099,34.516
NetC16_2: C16.2 D3.1 D6.1 R9.1 | length 10.1
  Top Layer w0.254: D6.1@41.049,15.78 ccw(c31.799,31.801) R9.1@47.82,22.551 ; R9.1@47.891,22.137 R9.1
NetC17_2: C17.2 D4.1 D7.1 R10.1 | length 9.7
  Top Layer w0.254: D7.1@28.587,13.582 ccw(c31.799,31.801) R10.1@38.126,14.417
NetC18_2: C18.2 D8.1 D11.1 R12.1 | length 9.7
  Top Layer w0.254: D11.1@17.627,19.909 ccw(c31.799,31.801) R12.1@25.472,14.417
NetC19_2: C19.2 D9.1 D12.1 R13.1 | length 9.8
  Top Layer w0.254: D12.1@13.299,31.801 ccw(c31.799,31.801) R13.1@15.778,22.551 ; D12.1@13.45,31.734 D12.1
NetC20_2: C20.2 D10.1 D13.1 R14.1 | length 10
  Top Layer w0.254: R14.1@13.58,35.013 cw(c31.799,31.801) D13.1@17.627,43.693 ; D13.1@17.794,43.248 D13.1
NetC21_2: C21.2 D14.1 D17.1 R15.1 | length 9.8
  Top Layer w0.254: R15.1 R15.1@19.983,46.036 ; R15.1@19.907,45.973 cw(c31.799,31.801) R15.1@19.983,46.036 ; R15.1@20.008,46.036 R15.1@19.983,46.036 ; D17.1@28.587,50.02 ccw(c31.799,31.801) R15.1@19.983,46.036
NetC22_2: C22.2 D15.1 D18.1 R16.1 | length 9.7
  Top Layer w0.254: R16.1@31.799,50.301 cw(c31.799,31.801) D18.1@41.049,47.822
NetC23_2: C23.2 D16.1 D19.1 R17.1 | length 9.7
  Top Layer w0.254: R17.1@43.691,45.973 cw(c31.799,31.801) D19.1@49.183,38.128
NetL1_2: L1.2 U1.5 | length 2.5
  Top Layer w0.254: U1.5@54.251,61.824 U1.5 55.154,61.788 55.372,61.57 L1.2
NetLED1_1: LED1.1 R1.1 | length 1.5
  Top Layer w0.254: LED1.1 51.415,57.635 R1.1
NFC_GPO: R4.1 U3.7 | length 1.6
  Top Layer w0.254: R4.1 47.549,53.222 47.549,52.859 U3.7
RF_DISABLE: R5.2 U2.19 U3.1 | length 45.9
  Top Layer w0.254: U2.19 v1(19.583,56.388) v1(19.583,56.388) ; v1@49.276,47.574 v1(49.454,47.574) 49.454,46.965 R5.2 50.41,46.238 U3.1
  Bottom Layer w0.254: v1(19.583,56.388) 20.168,56.972 49.955,56.972 51.361,55.566 51.361,49.761 49.454,47.854 v1(49.454,47.574)
SBWTCK: TP2.1 U2.2 | length 27.5
  Top Layer w0.254: v1(12.446,54.864) 12.719,55.137 U2.2 ; v1(29.388,63.373) 30.099,63.373 TP2.1
  Bottom Layer w0.254: v1(12.446,54.864) 12.446,58.776 14.148,60.477 27.102,60.477 29.388,62.763 v1(29.388,63.373)
SBWTDIO_RST: C11.2 R6.1 TP3.1 U2.1 | length 29.8
  Top Layer w0.254: v1(11.709,55.524) 11.836,55.524 11.949,55.637 U2.1 ; TP3.1@28.042,63.71 TP3.1 27.94,63.754 v1(27.94,62.357) 29.554,62.357 C11.2 29.844,62.167 R6.1
  Bottom Layer w0.254: v1(11.709,55.524) 11.709,58.522 11.786,58.598 11.684,58.699 15.342,62.357 v1(27.94,62.357)
VBAT: BT1.+ D1.1
VCC: C2.2 C6.2 C7.2 L2.1 R1.2 R2.2 R3.2 R4.2 R6.2 R11.1 TP1.1 U1.2 U1.4 U2.24 | length 60.6
  Top Layer w0.254: v1(13.843,59.055) 13.806,59.018 C7.2 C6.2 14.011,56.387 U2.24 ; v1(31.267,59.055) 31.267,60.616 R6.2 33.122,62.572 TP1.1 ; R4.2 R3.2 R2.2 ; L2.1 48.208,56.8 R2.2 ; v1(48.596,58.745) 48.596,56.642 ; U1.2 52.805,61.788 53.36,61.233 54.12,61.233 U1.4 ; R1.2 51.922,56.642 48.596,56.642 ; R2.2 48.596,56.642
  Bottom Layer w0.254: v1(13.843,59.055) v1(31.267,59.055) 48.285,59.055 v1(48.596,58.745)
VCC_F: C3.2 C4.2 C5.2 L2.2 U3.8 | length 6.3
  Top Layer w0.254: L2.2 44.672,55.307 C3.2 C4.2 C5.2 46.812,52.308 46.812,52.019 47.015,51.816 U3.8
VIN: C1.2 D1.2 L1.1 R11.2 U1.1 U1.6 | length 6.7
  Top Layer w0.254: U1.1 U1.6 54.996,62.438 55.478,62.92 L1.1 57.215,63.513 C1.2 C1.2@57.215,64.313
VREG: C8.2 U2.16 | length 1.5
  Top Layer w0.254: U2.16 20.561,54.637 C8.2
XIN: C9.2 U2.22 Y1.1 | length 4.3
  Top Layer w0.254: Y1.1@16.681,60.071 16.753,59.999 C9.2 17.079,57.611 U2.22 17.079,56.806
XOUT: C10.2 U2.21 Y1.4 | length 7.5
  Top Layer w0.254: Y1.4@16.681,63.271 17.893,62.059 C10.2 17.579,57.624 U2.21
pads on no net: 1.1 1.2 "0201 (0603).1" "0201 (0603).2" "0402 (1005).1" "0402 (1005).2" "0603 (1608).1" "0603 (1608).2" "0805 (2012).1" "0805 (2012).2" "1206 (3216).1" "1206 (3216).2" "1210 (3225).1" "1210 (3225).2" "2010 (5025).1" "2010 (5025).2" ?.0 ?.1 ?.2 ?.3 ?.4 ?.5 ?.6 ?.7 ?.8 ?.9 ?.10 ?.11 ?.12 ?.13 ?.14 ?.15 ?.16 ?.17 ?.18 ?.19 ?.20 ?.21 ?.22 ?.23 ?.24 ?.25 ?.26 ?.27 ?.28 ?.29 ?.30 ?.31 ?.32 ?.A ?.C ?.K D1.3 Y1.2 Y1.3

## Polygon pours and split planes (outlines as drawn)
CAP0.3 on Top Layer "Top" (solid, pour order 10): 18.747,24.091 cw(c18.812,24.129) 18.775,24.195 19.1,24.383 cw(c31.098,31.262) 31.651,45.081 cw(c31.648,45.006) 31.724,45.006 31.724,44.993 cw(c31.648,44.993) 31.651,44.918 ccw(c32.203,32.621) 21.847,25.969 22.233,26.192 cw(c31.294,31.028) 31.656,41.293 cw(c31.654,41.217) 31.73,41.217 cw(c31.654,41.217) 31.66,41.142 ccw(c32.424,32.409) 24.98,27.779 25.17,27.891 cw(c25.208,27.826) 25.17,27.891 cw(c25.209,27.826) 25.274,27.865 cw(c31.835,31.795) 25.273,27.865 25.274,27.865 ccw(c31.799,31.801) 38.321,27.86 ccw(c38.386,27.821) 38.32,27.858 38.321,27.86 cw(c38.386,27.821) 38.462,27.821 cw(c38.386,27.821) 38.451,27.782 38.452,27.784 cw(c30.951,32.023) 23.776,27.253 23.407,27.037 ccw(c32.716,31.722) 41.462,26.054 cw(c41.525,26.013) 41.525,26.089 cw(c41.525,26.013) 41.601,26.013 cw(c41.525,26.013) 41.592,25.977 cw(c30.887,31.741) 20.525,25.379 20.139,25.156 ccw(c32.616,31.464) 44.589,24.245 cw(c44.653,24.206) 44.653,24.281 cw(c44.653,24.206) 44.691,24.271 44.823,24.195 cw(c44.785,24.129) 44.861,24.129 cw(c44.785,24.129) 44.85,24.091 cw(c31.799,31.801)
CAP3.1 on Top Layer "Top" (solid, pour order 8): 18.596,24.354 ccw(c18.662,24.391) 18.7,24.325 18.831,24.401 ccw(c18.793,24.467) 18.869,24.467 ccw(c18.793,24.467) 18.86,24.503 cw(c31.098,31.262) 31.874,45.221 31.874,44.775 ccw(c32.203,32.621) 21.858,26.232 ccw(c21.923,26.272) 21.968,26.211 21.977,26.218 ccw(c21.932,26.279) 22.008,26.279 ccw(c21.932,26.279) 22,26.314 cw(c31.294,31.028) 31.874,41.434 31.874,41.007 ccw(c32.424,32.409) 24.993,28.048 ccw(c25.058,28.087) 25.098,28.023 25.229,28.103 ccw(c25.19,28.168) 25.266,28.168 ccw(c25.19,28.168) 25.256,28.205 ccw(c31.801,31.743) 25.256,28.205 cw(c31.799,31.801) 31.649,39.266 ccw(c31.648,39.341) 31.724,39.341 31.724,39.718 cw(c32.03,30.957) 40.797,30.957 cw(c32.03,30.957) 39.97,27.239 ccw(c40.038,27.207) 39.962,27.207 ccw(c40.038,27.207) 40.102,27.166 ccw(c31.401,32.624) 41.673,32.624 ccw(c31.401,32.624) 31.724,42.89 31.724,43.337 cw(c32.321,31.042) 44.63,31.042 cw(c32.321,31.042) 43.241,25.363 ccw(c43.308,25.328) 43.308,25.252 ccw(c43.308,25.328) 43.372,25.287 ccw(c31.682,32.678) 45.512,32.678 ccw(c31.682,32.678) 31.724,46.508 31.724,46.884 ccw(c31.648,46.884) 31.648,46.96 ccw(c31.648,46.884) 31.647,46.96 ccw(c31.799,31.801)
CAP1.3 on Top Layer "Top" (solid, pour order 6): 20.372,25.033 cw(c20.439,25.068) 20.401,25.134 20.412,25.14 cw(c20.45,25.075) 20.513,25.115 ccw(c30.887,31.741) 41.826,26.099 41.45,26.316 cw(c32.716,31.722) 23.633,26.928 cw(c23.7,26.963) 23.7,27.039 cw(c23.7,26.963) 23.762,27.007 ccw(c30.951,32.023) 38.692,27.907 38.364,28.091 cw(c38.401,28.157) 38.335,28.194 ccw(c31.799,31.801) 39.265,31.801 ccw(c31.799,31.801) 31.949,39.266 ccw(c31.807,31.834) 31.948,39.266 31.949,39.266 cw(c31.95,39.341) 31.874,39.341 31.874,39.496 cw(c31.95,39.496) 31.949,39.572 cw(c32.03,30.957) 40.646,30.957 cw(c32.03,30.957) 39.749,27.128 40.118,26.912 ccw(c31.401,32.624) 41.823,32.624 ccw(c31.401,32.624) 31.946,43.031 cw(c31.95,43.107) 31.874,43.107 31.874,43.119 cw(c31.95,43.119) 31.947,43.195 cw(c32.307,31.041) 44.465,31.041 cw(c32.307,31.041) 42.997,25.249 43.383,25.026 ccw(c31.682,32.678) 45.663,32.678 ccw(c31.682,32.678) 31.949,46.656 ccw(c31.617,32.69) 31.948,46.656 31.949,46.656 cw(c31.95,46.732) 31.874,46.732 31.874,46.884 cw(c31.95,46.884) 31.95,46.96 cw(c31.799,31.801) 46.958,31.801 cw(c31.799,31.801) 45.002,24.354 cw(c44.936,24.391) 44.936,24.315 cw(c44.936,24.391) 44.898,24.325 44.573,24.513 cw(c32.616,31.464)
VBAT on Top Layer "Boost_VBAT" (solid, pour order 20): 54.458,50.673 66.827,50.673 66.827,56.871 73.508,56.871 73.508,50.673 85.613,50.673 ccw(c85.613,50.76) 85.674,50.698 85.674,62.484 58.471,62.484 58.471,56.871 54.458,56.871
VIN on Top Layer "Boost_VIN" (solid, pour order 16): 56.49,62.128 55.474,62.128 55.474,63.375 56.337,63.375 56.337,65 59.563,65 59.563,59.588 56.806,59.588 56.806,62.128
VCC on Top Layer "Boost_VCC" (solid, pour order 18): 56.718,61.087 56.718,57.379 52.73,57.379 52.73,61.443 56.718,61.443
GND on Top Layer "Boost_GND" (solid, pour order 22): 49.852,56.593 49.852,65.041 49.909,65 61.798,65 61.798,56.566
GND on Top Layer "GND" (solid, pour order 24): 10.382,10.824 10.311,10.928 10.247,11.036 10.19,11.148 10.14,11.264 10.098,11.382 10.063,11.503 10.035,11.625 10.016,11.749 10.004,11.874 10,12 10,63 10.004,63.126 10.016,63.251 10.035,63.375 10.063,63.497 10.098,63.618 10.14,63.736 10.19,63.852 10.247,63.963 10.311,64.072 10.382,64.176 10.459,64.275 10.542,64.369 10.631,64.458 10.725,64.541 10.824,64.618 10.928,64.689 11.036,64.753 11.148,64.81 11.264,64.86 11.382,64.902 11.503,64.937 11.625,64.965 11.749,64.984 11.874,64.996 12,65 84.36,65 84.486,64.996 84.611,64.984 84.735,64.965 84.857,64.937 84.978,64.902 85.096,64.86 85.212,64.81 85.323,64.753 85.432,64.689 85.536,64.618 85.635,64.541 85.729,64.458 85.818,64.369 85.901,64.275 85.978,64.176 86.049,64.072 86.113,63.963 86.17,63.852 86.22,63.736 86.262,63.618 86.297,63.497 86.325,63.375 86.344,63.251 86.356,63.126 86.36,63 86.36,12 86.356,11.874 86.344,11.749 86.325,11.625 86.297,11.503 86.262,11.382 86.22,11.264 86.17,11.148 86.113,11.036 86.049,10.928 85.978,10.824 85.901,10.725 85.818,10.631 85.729,10.542 85.635,10.459 85.536,10.382 85.432,10.311 85.323,10.247 85.212,10.19 85.096,10.14 84.978,10.098 84.857,10.063 84.735,10.035 84.611,10.016 84.486,10.004 84.36,10 12,10 11.874,10.004 11.749,10.016 11.625,10.035 11.503,10.063 11.382,10.098 11.264,10.14 11.148,10.19 11.036,10.247 10.928,10.311 10.824,10.382 10.725,10.459 10.631,10.542 10.542,10.631 10.459,10.725
GND on Bottom Layer "GND-Bottom" (hatched 45Degree grid 1.219 track 0.254, pour order 26): 10.382,10.824 10.311,10.928 10.247,11.036 10.19,11.148 10.14,11.264 10.098,11.382 10.063,11.503 10.035,11.625 10.016,11.749 10.004,11.874 10,12 10,63 10.004,63.126 10.016,63.251 10.035,63.375 10.063,63.497 10.098,63.618 10.14,63.736 10.19,63.852 10.247,63.963 10.311,64.072 10.382,64.176 10.459,64.275 10.542,64.369 10.631,64.458 10.725,64.541 10.824,64.618 10.928,64.689 11.036,64.753 11.148,64.81 11.264,64.86 11.382,64.902 11.503,64.937 11.625,64.965 11.749,64.984 11.874,64.996 12,65 84.36,65 84.486,64.996 84.611,64.984 84.735,64.965 84.857,64.937 84.978,64.902 85.096,64.86 85.212,64.81 85.323,64.753 85.432,64.689 85.536,64.618 85.635,64.541 85.729,64.458 85.818,64.369 85.901,64.275 85.978,64.176 86.049,64.072 86.113,63.963 86.17,63.852 86.22,63.736 86.262,63.618 86.297,63.497 86.325,63.375 86.344,63.251 86.356,63.126 86.36,63 86.36,12 86.356,11.874 86.344,11.749 86.325,11.625 86.297,11.503 86.262,11.382 86.22,11.264 86.17,11.148 86.113,11.036 86.049,10.928 85.978,10.824 85.901,10.725 85.818,10.631 85.729,10.542 85.635,10.459 85.536,10.382 85.432,10.311 85.323,10.247 85.212,10.19 85.096,10.14 84.978,10.098 84.857,10.063 84.735,10.035 84.611,10.016 84.486,10.004 84.36,10 12,10 11.874,10.004 11.749,10.016 11.625,10.035 11.503,10.063 11.382,10.098 11.264,10.14 11.148,10.19 11.036,10.247 10.928,10.311 10.824,10.382 10.725,10.459 10.631,10.542 10.542,10.631 10.459,10.725

## Other copper
Top Layer:
  pour cut-out: 53.035,9.999 86.344,9.999 86.36,42.621 59.969,42.621 53.274,50.765 49.342,47.243 53.035,42.891
  region net CAP2.1: 31.835,27.127 cw(c31.835,31.724) 27.238,31.724 cw(c31.835,31.724) 31.835,36.322 cw(c31.835,31.724) 36.432,31.724 cw(c31.835,31.724)
  pour cut-out: 31.835,25.978 cw(c31.835,31.724) 26.088,31.724 cw(c31.835,31.724) 31.835,37.471 cw(c31.835,31.724) 37.582,31.724 cw(c31.835,31.724)
  pour cut-out: 31.799,14.469 cw(c31.799,31.801) 14.467,31.801 cw(c31.799,31.801) 31.799,49.133 cw(c31.799,31.801) 49.131,31.801 cw(c31.799,31.801) 31.799,14.469 cw(c32.799,15.469) 31.799,16.469 cw(c31.799,31.801) 16.467,31.801 cw(c31.799,31.801) 31.799,47.133 cw(c31.799,31.801) 47.131,31.801 cw(c31.799,31.801) 31.799,16.469 cw(c30.799,15.469)
  pour cut-out: 18.596,24.353 ccw(c18.662,24.391) 18.737,24.391 ccw(c18.662,24.391) 18.728,24.428 cw(c31.799,31.801) 31.649,46.808 ccw(c31.648,46.884) 31.724,46.884 ccw(c31.648,46.884) 31.647,46.96 ccw(c31.799,31.801)
Bottom Layer:
  pour cut-out: 53.035,9.668 86.944,9.638 86.944,42.621 59.969,42.621 53.274,50.765 49.342,47.243 53.035,42.891

## Silkscreen, mask and mechanical layers (free items; w line width, h text height)
Top Overlay:
  drawing of 18 lines, arcs and shapes, not listed
  text "Tap Here!" at 66.319,37.414 h3.81
  text "Badr Bouslikhin" at 55.448,30.582 h5.33
  text "•" at 30.778,29.196 h8.05
  text "Electrical Engineer" at 55.296,26.518 h4.57
  text "Hardware Hacker" at 55.397,22.682 h4.57
  text "+33 7 61 76 43 71" at 57.683,18.821 h3.81
  text "bouslikhin.badr@gmail.com" at 48.971,15.875 h3.81
  text "linkedin.com/in/bouslikhinbadr" at 45.06,12.065 h3.81
Bottom Overlay:
  drawing of 38 lines, arcs and shapes, not listed
  text "mil (mm)" at 42.697,62.76 h1.14
  text "Trace Width" at 59.512,62.763 h1.52
  text "QFP 32" at 28.169,62.692 h1.14
  text "QFN 12" at 18.255,62.618 h1.14
  text "6 (0.1524)" at 42.672,60.173 h1.14
  text "0.5 mm" at 18.255,58.298 h1.14
  text "8 (0.2032)" at 42.672,58.268 h1.14
  text "10 (0.254)" at 42.672,56.363 h1.14
  text "DFN 6" at 17.779,55.204 h1.14
  text "12 (0.3048)" at 42.672,54.458 h1.14
  text "18 (0.4572)" at 42.672,52.553 h1.14
  text "0.5 mm" at 18.255,51.186 h1.14
  text "0.8 mm" at 28.118,51.079 h1.14
  text "24 (0.6096)" at 42.672,50.648 h1.14
  text "38 (0.9652)" at 42.672,48.73 h1.14
  text "SSOP 20" at 19.329,48.392 h1.14
  text "SOIC 8" at 28.644,47.3 h1.14
  text "40 (1.016)" at 42.672,46.812 h1.14
  text "Imperial (Metric)" at 81.483,46.215 h1.14 r270
  text "SMD R/C/L" at 84.074,46.228 h1.52 r270
  text "(mm)" at 44.831,43.129 h1.14
  text "XTAL/OSC" at 57.48,43.129 h1.52
  text "100" at 36.83,42.567 h2.03
  text "HC49" at 51.384,41.224 h1.14
  text "1.27 mm" at 29.108,39.954 h1.14
  text "80" at 36.83,39.012 h2.03
  text "0.65 mm" at 19.228,38.811 h1.14
  text "SMC" at 61.58,36.811 h1.14 r270
  text "SMB" at 68.311,36.811 h1.14 r270
  text "SMA" at 73.366,36.811 h1.14 r270
  text "SOD80" at 77.15,36.811 h1.14 r270
  text "SOD323" at 79.858,36.805 h1.14 r270
  text "SC79" at 82.002,36.811 h1.14 r270
  text "TH Cap Dia. (mm)" at 28.6,36.373 h1.14
  text "60" at 36.83,35.457 h1.52
  text "2x2.5" at 55.855,33.934 h1.14
  text "5x3.2" at 48.311,32.487 h1.14
  text "40 mil" at 36.83,31.902 h1.02
  text "Font Size" at 37.888,31.902 h1.52 r270
  text "3" at 20.803,29.718 h1.14
  text "SOT23" at 81.839,29.515 h1.14
  text "1.2x2" at 55.804,28.473 h1.14
  text "SOT223" at 73.914,26.543 h1.14
  text "6" at 20.853,25.73 h1.14
  text "10" at 21.234,23.774 h1.14
  text "SOT89" at 82.194,23.495 h1.14
  text "PNP" at 31.293,22.936 h1.14
  text "PMOS" at 38.278,22.936 h1.14
  text "K" at 18.567,21.361 h0.8
  text "A" at 24.206,21.361 h0.8
  text "+" at 23.012,20.803 h0.8
  text "Zener" at 23.597,19.279 h1.14
  text "K" at 11.633,19.025 h0.8
  text "A" at 17.247,19.025 h0.8
  text "+" at 16.078,18.466 h0.8
  text "K" at 18.72,16.764 h0.8
  text "A" at 24.206,16.764 h0.8
  text "+" at 23.063,16.18 h0.8
  text "D2PAK" at 64.541,15.342 h1.14 r270
  text "Schottky" at 25.375,14.707 h1.14
  text "NPN" at 31.217,14.453 h1.14
  text "NMOS" at 38.278,14.453 h1.14
  text "DPAK" at 81.204,11.786 h1.14 r270
  text "Diodes and Transistors" at 84.074,11.532 h1.52 r270
  text "Can I help you?" at 44.653,11.354 h2.29
  text "1 mm = 39.37 mils" at 64.592,10.566 h1.02
Mechanical 1:
  lines w0.013: 10,12 10,63 10.004,63.126 10.016,63.251 10.035,63.375 10.063,63.497 10.098,63.618 10.14,63.736 10.19,63.852 10.247,63.963 10.311,64.072 10.382,64.176 10.459,64.275 10.542,64.369 10.631,64.458 10.725,64.541 10.824,64.618 10.928,64.689 11.036,64.753 11.148,64.81 11.264,64.86 11.382,64.902 11.503,64.937 11.625,64.965 11.749,64.984 11.874,64.996 12,65 84.36,65 84.486,64.996 84.611,64.984 84.735,64.965 84.857,64.937 84.978,64.902 85.096,64.86 85.212,64.81 85.323,64.753 85.432,64.689 85.536,64.618 85.635,64.541 85.729,64.458 85.818,64.369 85.901,64.275 85.978,64.176 86.049,64.072 86.113,63.963 86.17,63.852 86.22,63.736 86.262,63.618 86.297,63.497 86.325,63.375 86.344,63.251 86.356,63.126 86.36,63 86.36,12 86.356,11.874 86.344,11.749 86.325,11.625 86.297,11.503 86.262,11.382 86.22,11.264 86.17,11.148 86.113,11.036 86.049,10.928 85.978,10.824 85.901,10.725 85.818,10.631 85.729,10.542 85.635,10.459 85.536,10.382 85.432,10.311 85.323,10.247 85.212,10.19 85.096,10.14 84.978,10.098 84.857,10.063 84.735,10.035 84.611,10.016 84.486,10.004 84.36,10 12,10
Mechanical 2:
  circle w0.254: c31.725,31.801 r6.35
Mechanical 18:
  circle w0.23: c31.835,31.724 r4.597
  circle w0.254: c31.877,32.004 r9.652
  circle w0.254: c31.877,32.004 r20.447

## Dimensions
84.36,65 to 84.36,10 on Mechanical 1
86.36,63 to 10,63 on Mechanical 1